# Altium PCB Micro+Complete+Ver1.0.pcbdoc
Units mil, origin at the board's own origin, x right, y up, seen from the top; angles counter-clockwise.
Board outline 3040 x 2112.05 mil, 2 copper layers (Top Layer, Bottom Layer); 36 components, 59 nets, 167 pads, 18 vias.
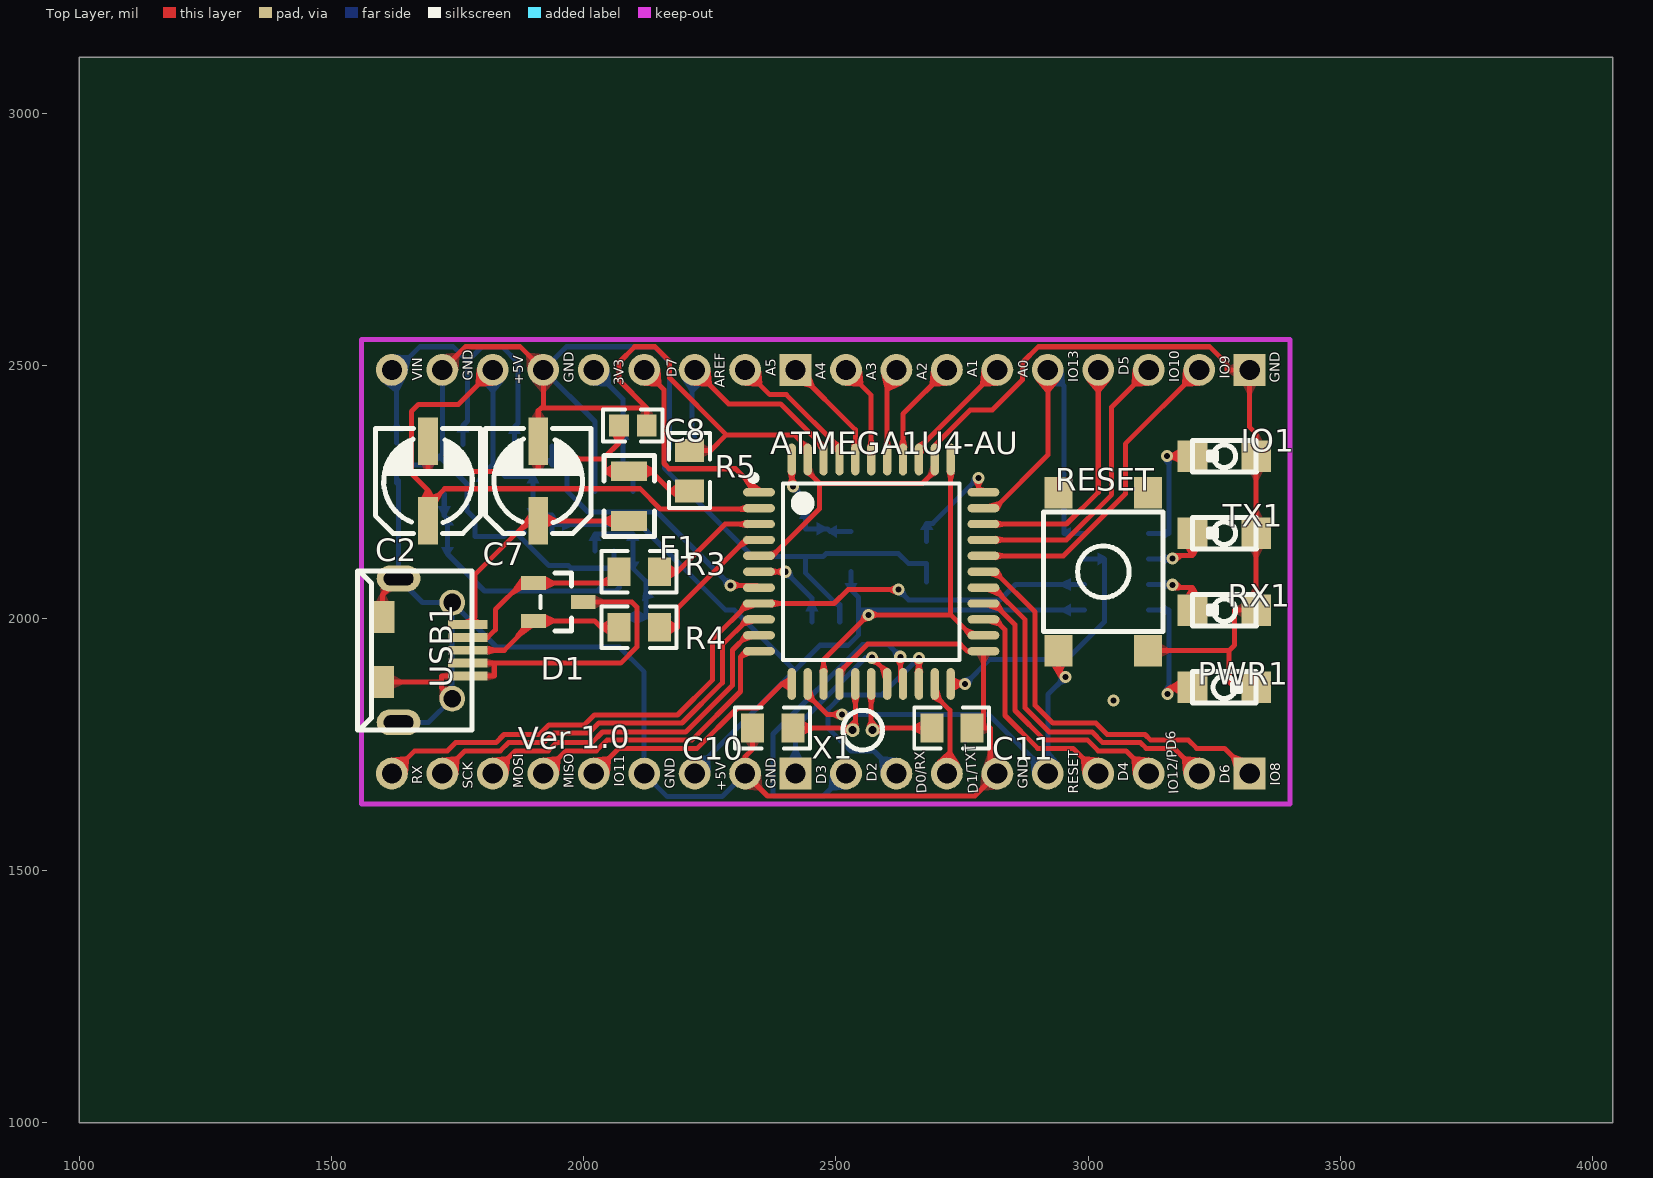
[diagram p0: Top Layer view]
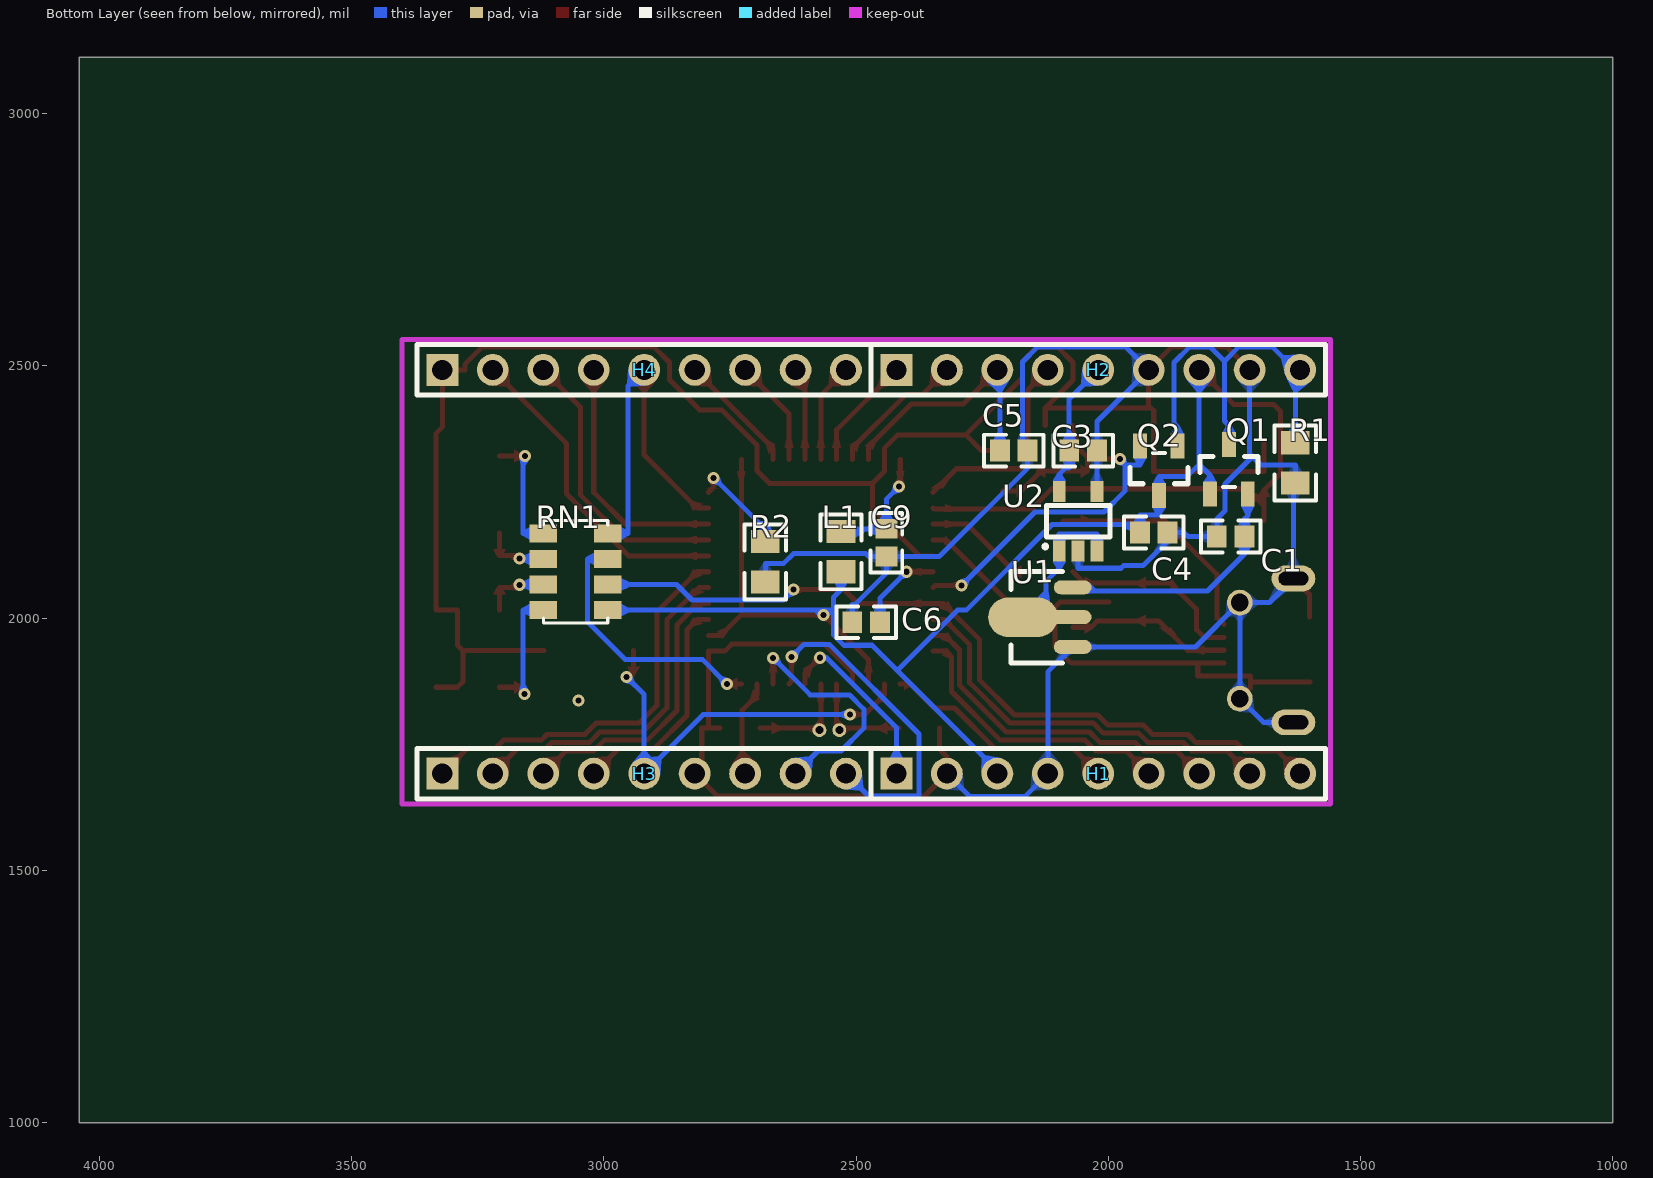
[diagram p1: Bottom Layer view, seen from below]

## Layer stack, top to bottom
Top Layer: signal copper (thickness not stored)
Dielectric: dielectric 12.6, FR-4, Dk 4.8
Bottom Layer: signal copper (thickness not stored)

## Board outline
4040,1000 1000,1000 1000,3112.05 4040,3112.05

## Components (designator, comment, footprint, x,y, rotation, side; value= is the part's Value field where it differs from the comment)
ATMEGA1U4-AU "ATMEGA32U4-AU" QFP-44_10X10X08P 2570,2092.05 r0 top
C1 "100nF" 0603#1 1757.55,2162.05 r0 bottom
C2 "22uF" CAP-SMD_BD5.0-L5.3-W5.3-FD 1691.49,2271.97 r90 top
C3 "1uF" 0603#1 2050,2332.05 r180 bottom
C4 "100nF" 0603#1 1910,2169.61 r180 bottom
C5 "100nF" 0603#1 2187.56,2332.05 r180 bottom
C6 "1uF" 0603#1 2480,1992.05 r0 bottom
C7 "22uF" CAP-SMD_BD5.0-L5.3-W5.3-FD 1910,2272.05 r90 top
C8 "100nF" 0603#2 2097.56,2382.05 r180 top
C9 "1uF" 0603#1 2440,2149.61 r270 bottom
C10 "22pF" 0805#1 2375,1782.05 r0 top
C11 "22pF" 0805#1 2730,1782.05 r0 top
D1 "AZ5125-02S.R7G" SOT-23-3_L2.9-W1.6-P1.90-LS2.8-BR#1 1950,2032.05 r180 top
F1 "SMD1206P050TF/15" FUSE-1206 2090,2242.05 r90 top
H1 "A2541WV-9P" SIP-2.54MM-9P-CJT-H8.54 2020,1692.05 r180 bottom
H2 "A2541WV-9P" SIP-2.54MM-9P-CJT-H8.54 2020,2492.05 r180 bottom
H3 "A2541WV-9P" SIP-2.54MM-9P-CJT-H8.54 2920,1692.05 r180 bottom
H4 "A2541WV-9P" SIP-2.54MM-9P-CJT-H8.54 2920,2492.05 r180 bottom
IO1 "LTST-C21KGKT" LED-SMD-3.2X1.6X1.1 3270,2321.03 r180 top
L1 "30Ω" 0805#2 2530,2132.05 r270 bottom
PWR1 "LTST-C21TBKT" LED-SMD-3.2X1.6X1.1 3270,1863.07 r0 top
Q1 "FDN340P" SOT-23-3_L2.9-W1.6-P1.90-LS2.8-BR#2 1761.13,2295.18 r90 bottom
Q2 "FDN340P" SOT-23-3_L2.9-W1.6-P1.90-LS2.8-BR#2 1900,2292.05 r270 bottom
R1 "10K" 0805#2 1629.5,2307.69 r270 bottom
R2 "1K" 0805#2 2680,2112.05 r270 bottom
R3 "22" 0805#1 2110,2092.05 r0 top
R4 "22" 0805#1 2110,1982.05 r0 top
R5 "10K" 0805#1 2210,2292.05 r270 top
RESET "TSA063G50-250" SW-SMD-T6X6-9.5X5.8 3030,2092.05 r90 top
RN1 "1K" 1206_X4 3056.1,2092.05 r90 bottom
RX1 "LTST-C21KSKT" LED-SMD-3.2X1.6X1.1 3270,2015.78 r180 top
TX1 "LTST-C21KSKT" LED-SMD-3.2X1.6X1.1 3270,2168.4 r180 top
U1 "LM1117F-5.0" SOT-89(SOT-89-3) 2120,2002.05 r270 bottom
U2 "LP2985-33DBVR" SOT-23-5 2060,2192.05 r270 bottom
USB1 "micro USBFemale" MICRO-USB-1 1685.5,1936.05 r180 top
X1 "16MHz" TXAL-1.9*6 2553,1778.05 r0 top

## Footprints (in the part's own frame and the unit in brackets; to place one, negate y for a bottom-side part, rotate by r counter-clockwise, add the part's x,y. Pads: shape width x height; smd on the part's side, far side on the other; paste and mask are expansions set on the pad)
0603#1 [mm]
  rect 1x1.1 smd: 1(0.7,0) 2(-0.7,0)
  silkscreen extent -1.5,-0.8 1.5,0.8
0603#2 [mm]
  rect 1x1.1 smd: 1(-0.7,0) 2(0.7,0)
  silkscreen extent -1.5,-0.8 1.5,0.8
0805#1 [mm]
  rect 1.16x1.45 smd: 1(-1.016,0) 2(1.016,0)
  silkscreen extent -1.9,-1.03 1.87,1.04
0805#2 [mm]
  rect 1.16x1.45 smd: 1(1.016,0) 2(-1.016,0)
  silkscreen extent -1.87,-1.04 1.9,1.03
1206_X4 [mm]
  rect 0.9x1.375 smd: 1(1.933,1.623) 2(0.643,1.623) 3(-0.643,1.623) 4(-1.933,1.623) 5(-1.933,-1.623) 6(-0.643,-1.623) 7(0.643,-1.623) 8(1.933,-1.623)
  silkscreen extent -2.58,-1.62 2.58,1.62
CAP-SMD_BD5.0-L5.3-W5.3-FD [mm]
  rect 2.4x1 smd: 1(-2,0) 2(2,0)
  silkscreen extent -2.65,-2.65 2.65,2.65
FUSE-1206 [mm]
  rect 1x1.801 smd: 1(-1.25,0) 2(1.25,0)
  silkscreen extent -2.03,-1.27 2.03,1.27
LED-SMD-3.2X1.6X1.1 [mm]
  rect 1.5x1.6 smd: 1(-1.6,0) 2(1.6,0)
  silkscreen extent -1.6,-0.8 1.6,0.8
MICRO-USB-1 [mm]
  round 1.3 hole 0.9: 0(-1.371,2.431) 0(-1.371,-2.41)
  oval 2.2x1.3 hole 0.7 slot 1.5 at 0 deg: 0(1.329,3.619) 0(1.329,-3.62)
  rect 1.2x1.6 smd: 0(2.14,-1.683) 0(2.156,1.596)
  rect 2x0.45 smd: 1(-2.156,-1.31) 2(-2.156,-0.66) 3(-2.156,-0.01) 4(-2.156,0.64) 5(-2.156,1.29)
  silkscreen extent -2.36,-4 3.4,4
QFP-44_10X10X08P [mm]
  oval 1.6x0.42 smd: 1(-5.65,4) 2(-5.65,3.2) 3(-5.65,2.4) 4(-5.65,1.6) 5(-5.65,0.8) 6(-5.65,0) 7(-5.65,-0.8) 8(-5.65,-1.6) 9(-5.65,-2.4) 10(-5.65,-3.2) 11(-5.65,-4) 23(5.65,-4) 24(5.65,-3.2) 25(5.65,-2.4) 26(5.65,-1.6) 27(5.65,-0.8) 28(5.65,0) 29(5.65,0.8) 30(5.65,1.6) 31(5.65,2.4) 32(5.65,3.2) 33(5.65,4)
  oval 0.42x1.6 smd: 12(-4,-5.65) 13(-3.2,-5.65) 14(-2.4,-5.65) 15(-1.6,-5.65) 16(-0.8,-5.65) 17(0,-5.65) 18(0.8,-5.65) 19(1.6,-5.65) 20(2.4,-5.65) 21(3.2,-5.65) 22(4,-5.65) 34(4,5.65) 35(3.2,5.65) 36(2.4,5.65) 37(1.6,5.65) 38(0.8,5.65) 39(0,5.65) 40(-0.8,5.65) 41(-1.6,5.65) 42(-2.4,5.65) 43(-3.2,5.65) 44(-4,5.65)
  silkscreen extent -6.08,-4.45 4.45,4.87
SIP-2.54MM-9P-CJT-H8.54 [mm]
  rect 1.6x1.6 hole 1.02: 1(-10.16,0)
  round 1.6 hole 1.02: 2(-7.62,0) 3(-5.08,0) 4(-2.54,0) 5(0,0) 6(2.54,0) 7(5.08,0) 8(7.62,0) 9(10.16,0)
  silkscreen extent -11.43,-1.27 11.43,1.27
SOT-23-3_L2.9-W1.6-P1.90-LS2.8-BR#1 [mm]
  rect 1.25x0.7 smd: 1(1.25,-0.95) 2(1.25,0.95) 3(-1.25,0)
  silkscreen extent -0.65,-1.46 0.9,1.46
SOT-23-3_L2.9-W1.6-P1.90-LS2.8-BR#2 [mm]
  rect 1.25x0.7 smd: 1(-1.25,0.95) 2(-1.25,-0.95) 3(1.25,0)
  silkscreen extent -0.9,-1.46 0.65,1.46
SOT-23-5 [mm]
  rect 1.06x0.65 smd: 1(1.5,-0.95) 2(1.5,0) 3(1.5,0.95) 4(-1.5,0.95) 5(-1.5,-0.95)
  silkscreen extent -0.8,-1.71 1.33,1.6
SOT-89(SOT-89-3) [mm]
  oval 0.7x1.9 smd: 1(1.501,1.25) 3(-1.501,1.25)
  oval 2x3.5 smd: 2(0,-1.25)
  oval 0.7x2.1 smd: 2(0,1.151)
  silkscreen extent -2.3,-1.85 2.3,0.75
SW-SMD-T6X6-9.5X5.8 [mm]
  rect 1.6x1.4 smd: 1(-3.975,2.249) 2(3.975,2.249) 3(-3.975,-2.249) 4(3.975,-2.249)
  silkscreen extent -3,-3 3,3
TXAL-1.9*6 [mm]
  round 0.7 hole 0.4: 1(-0.5,0) 2(0.5,0)
  silkscreen extent -1,-1 1,1

## Via types
v1: diameter 24, hole 12, Top Layer to Bottom Layer, 18 vias

## Nets (pads, with @x,y where several pads share a name; then routed paths per layer and width w, separated by ;. In a path a pad name is that pad's centre, name@x,y a point inside that pad or via, vN(x,y) a via of type N, cw(c..) or ccw(c..) an arc to the next point about the centre after c; other vN are vias at no path point)
3V3: C3.2 H2.5 U2.5 | length 277.5
  Bottom Layer w10: H2.5 2077.6,2434.45 C3.2 2077.6,2297.35 2085.2,2297.35 2097.4,2285.05 U2.5@2097.4,2251.05
+5V: ATMEGA1U4-AU.2 ATMEGA1U4-AU.14 ATMEGA1U4-AU.24 ATMEGA1U4-AU.34 C2.1 C4.2 H1.3 H2.7 L1.1 Q1.1 Q2.3 RN1.5 | length 3963.4
  Top Layer w10: C2.1 C2.1@1691.5,2223.35 ; H2.7 1751.8,2423.85 1672.7,2423.85 1658.7,2409.85 1658.7,2286.35 1691.5,2253.55 C2.1@1691.5,2223.35 ; ATMEGA1U4-AU.2 2345.6,2216.15 2152.4,2216.15 2112,2256.55 1724.6,2256.55 C2.1@1691.5,2223.35 ; ATMEGA1U4-AU.14 2475.5,1917.75 v1(2564.4,2006.65) 2727.5,2006.65 ; ATMEGA1U4-AU.34@2727.5,2314.45 2727.5,2006.65 ; ATMEGA1U4-AU.24@2792.4,1966.05 2768.1,1966.05 2727.5,2006.65
  Bottom Layer w10: Q1.1 1798.5,2283.65 1820,2305.15 ; H2.7 1820,2305.15 ; C4.2 C4.2@1937.6,2185.65 ; H1.3 2220,1697.95 2418.5,1896.35 ; L1.1 2530,2056.15 2545,2041.15 2545,2015.95 ; v1(2564.4,2006.65) v1@2564.4,2015.95 ; RN1.5 2952,2015.95 v1@2564.4,2015.95 ; 1820,2305.15 1844.6,2280.55 1900,2280.55 Q2.3 1900,2205.15 1900.8,2204.35 1937.6,2204.35 C4.2@1937.6,2185.65 ; C4.2@1937.6,2185.65 2111.6,2185.65 2281.4,2015.95 2298.9,2015.95 2418.5,1896.35 ; 2418.5,1896.35 2468.4,1946.35 2524.3,1946.35 2545,1967.15 2545,2015.95 ; 2545,2015.95 v1@2564.4,2015.95
A0: ATMEGA1U4-AU.36 H4.6 | length 242
  Top Layer w10: ATMEGA1U4-AU.36@2664.5,2314.45 2664.5,2336.55 H4.6
A1: ATMEGA1U4-AU.37 H4.7 | length 213.6
  Top Layer w10: ATMEGA1U4-AU.37@2633,2314.45 2633,2405.05 H4.7
A2: ATMEGA1U4-AU.38 H4.8 | length 185.3
  Top Layer w10: ATMEGA1U4-AU.38@2601.5,2314.45 2601.5,2473.55 H4.8
A3: ATMEGA1U4-AU.39 H4.9 | length 198.3
  Top Layer w10: H4.9 2570,2442.05 ATMEGA1U4-AU.39@2570,2314.45
A4: ATMEGA1U4-AU.40 H2.1 | length 226.7
  Top Layer w10: H2.1 2538.5,2373.55 ATMEGA1U4-AU.40@2538.5,2314.45
A5: ATMEGA1U4-AU.41 H2.2 | length 274.2
  Top Layer w10: H2.2 2369.1,2442.95 2401.8,2442.95 2507,2337.75 ATMEGA1U4-AU.41@2507,2314.45
AREF: ATMEGA1U4-AU.42 C5.2 H2.3 | length 505.9
  Top Layer w10: H2.3 2287.2,2424.85 2390.3,2424.85 2475.5,2339.65 ATMEGA1U4-AU.42@2475.5,2314.45
  Bottom Layer w10: C5.2 2215.1,2487.15 H2.3
AVCC: ATMEGA1U4-AU.44 C9.2 L1.2 | length 240.8
  Top Layer w10: ATMEGA1U4-AU.44@2412.5,2314.45 2412.5,2263.25 v1(2414.7,2261.15)
  Bottom Layer w10: v1(2414.7,2261.15) 2440,2235.75 C9.2 2483.3,2177.15 2488.4,2172.05 L1.2
D0/RX: ATMEGA1U4-AU.20 H3.8 | length 483.9
  Top Layer w10: ATMEGA1U4-AU.20 v1(2664.5,1921.35)
  Bottom Layer w10: H3.8 2575.4,1736.65 2530,1736.65 2484.6,1782.05 2484.6,1819.45 2513.1,1847.95 2591.1,1847.95 v1(2664.5,1921.35)
D1/TXT: ATMEGA1U4-AU.21 H3.7 | length 192.4
  Top Layer w10: ATMEGA1U4-AU.21 2696,1847.65 2725.9,1817.75 2725.9,1697.95 H3.7
D2/SDA: ATMEGA1U4-AU.19 H3.9 | length 676.3
  Top Layer w10: v1(2627.6,1923.45) 2627.6,1875.05 ATMEGA1U4-AU.19
  Bottom Layer w10: H3.9 2475.4,1647.45 2378.3,1647.45 2375.4,1650.35 2375.4,1770.35 2553.1,1948.05 2603.1,1948.05 v1(2627.6,1923.45)
D3/SCL: ATMEGA1U4-AU.18 H1.1 | length 364.1
  Top Layer w10: v1(2571.6,1921.55) 2601.5,1891.75 ATMEGA1U4-AU.18
  Bottom Layer w10: H1.1 2420,1782.85 2558.8,1921.55 v1(2571.6,1921.55)
D4*: ATMEGA1U4-AU.25 H3.4 | length 453.7
  Top Layer w10: ATMEGA1U4-AU.25 2814.5,1997.55 2835,1977.05 2835,1807.05 2900,1742.05 2970,1742.05 H3.4
D5*: ATMEGA1U4-AU.31 H4.4 | length 496.3
  Top Layer w10: ATMEGA1U4-AU.31@2792.4,2186.55 2957.1,2186.55 3020,2249.45 H4.4
D6*: ATMEGA1U4-AU.27 H3.2 | length 682.8
  Top Layer w10: ATMEGA1U4-AU.27 2811.5,2060.55 2875,1997.05 2875,1822.05 2922.8,1774.25 3007.8,1774.25 3028.9,1753.15 3103.9,1753.15 3115,1742.05 3170,1742.05 H3.2
D7: ATMEGA1U4-AU.1 H2.4 | length 413.7
  Top Layer w10: H2.4 2159.3,2452.75 2159.3,2306.55 2169.7,2296.15 2301,2296.15 ATMEGA1U4-AU.1@2347.6,2249.55
D+: ATMEGA1U4-AU.4 R4.2 | length 291.3
  Top Layer w10: R4.2 2185.9,1982.05 2185.9,2019.65 2321.3,2155.05 ATMEGA1U4-AU.4
D-: ATMEGA1U4-AU.3 R3.2 | length 236.7
  Top Layer w10: R3.2 2185.9,2092.05 2280.4,2186.55 ATMEGA1U4-AU.3@2347.6,2186.55
GND: ATMEGA1U4-AU.5 ATMEGA1U4-AU.15 ATMEGA1U4-AU.23 ATMEGA1U4-AU.35 ATMEGA1U4-AU.43 C1.1 C2.2 C3.1 C4.1 C5.1 C6.1 C7.2 C8.1 C9.1 C10.1 C11.2 D1.3 H1.2 H1.4 H2.6 H2.8 H3.6 H4.1 IO1.1 PWR1.2 R1.1 R2.1 R5.1 RESET.3 RX1.1 TX1.1 U1.1 U2.2 U2.4 USB1.0 USB1.4 USB1.5 | length 10006.8
  Top Layer w10: USB1.0@1600.6,1873.25 1717.9,1873.25 ; USB1.0@1601.3,2002.35 1601.3,2046.85 1601.5,2046.85 USB1.0@1633.2,2078.55 ; C2.2@1691.5,2350.65 1691.5,2290.35 1909.9,2290.35 1910,2290.45 C7.2 1910,2411.15 1915.7,2416.75 1920,2416.75 ; H2.8 1765.9,2537.95 1874.1,2537.95 H2.6 1920,2416.75 ; USB1.0@1739.5,1840.35 1717.9,1861.95 1717.9,1873.25 ; USB1.4@1770.4,1910.85 1822.8,1910.85 ; D1.3 2095.6,2032.05 2105.9,2021.75 2105.9,1943.35 2073.5,1910.85 1822.8,1910.85 ; C8.1 2125.1,2416.75 ; R5.1 2230.8,2332.05 2251.6,2332.05 2282.9,2363.35 ; C10.1 2335,1740.45 2320,1725.45 H1.2 2364.6,1647.45 2775.4,1647.45 H3.6 2805.9,1706.15 2805.9,1782.05 C11.2@2791.1,1782.05 ; ATMEGA1U4-AU.5 2374.4,2123.55 2467.6,2216.75 2467.6,2267.25 ; ATMEGA1U4-AU.15 2507,1892.95 2562.6,1948.55 2746.4,1948.55 2760.4,1934.55 ATMEGA1U4-AU.23 2792.4,1783.45 C11.2@2791.1,1782.05 ; C11.2 C11.2@2791.1,1782.05 ; RESET.3 3279.2,1935.55 ; PWR1.2@3333,1863.05 3290.4,1863.05 3279.2,1874.25 3279.2,1935.55 ; 1717.9,1873.25 1717.9,1885.25 1770.4,1885.25 1822.8,1885.25 1822.8,1910.85 ; 1920,2416.75 2125.1,2416.75 ; 2125.1,2416.75 2070,2471.95 2070,2506.75 2101.2,2537.95 2141.5,2537.95 2170,2509.45 2170,2476.25 2282.9,2363.35 ; 2282.9,2363.35 2417.5,2363.35 2444,2336.85 2444,2314.45 2444,2290.85 2467.6,2267.25 ; 2467.6,2267.25 2671.5,2267.25 2696,2291.75 2696,2314.45 2696,2342.35 2766.1,2412.45 2809.9,2412.45 2870,2472.55 2870,2506.75 2901.2,2537.95 3240.7,2537.95 3275.4,2503.15 3275.4,2492.05 H4.1 3320,2378.65 3333,2365.65 IO1.1 TX1.1 RX1.1 3290.4,2015.75 3290.4,1946.75 3279.2,1935.55
  Bottom Layer w10: R1.1@1629.5,2267.65 R1.1@1629.5,2276.05 ; USB1.0@1633.2,1793.55 1692.7,1793.55 1739.5,1840.35 USB1.0@1739.5,2030.95 ; H2.8 1720,2326.05 1714.4,2320.45 ; C4.1 C4.1@1866.1,2169.55 ; U2.4@2022.6,2251.05 2022.6,2297.15 2022.4,2297.35 C3.1 2022.4,2389.65 H2.6 1965.9,2537.95 2139.8,2537.95 2170,2507.75 2170,2336.35 C5.1@2160,2326.35 ; U2.2 2060,2098.95 1975.4,2098.95 1970.2,2104.15 1931.5,2104.15 C4.1@1866.1,2169.55 ; C5.1 C5.1@2160,2326.35 ; H1.2 2274.1,1646.15 2165.9,1646.15 H1.4 2120,1893.75 U1.1 1827.5,1942.95 USB1.0@1739.5,2030.95 ; C6.1 2507.6,2026.75 2502.5,2026.75 2440,2089.25 2440,2120.45 C9.1 ; R2.1 2680,2107.95 2644.1,2107.95 2624.1,2127.95 2480.7,2127.95 2474.7,2122.05 C9.1 ; R1.1@1629.5,2276.05 1633.2,2272.35 1633.2,2078.55 1680.8,2030.95 USB1.0@1739.5,2030.95 ; R1.1@1629.5,2276.05 1629.5,2303.65 1697.6,2303.65 1714.4,2320.45 ; 1714.4,2320.45 1769,2265.85 1769,2212.95 1785.1,2196.75 C1.1 1842.1,2162.05 1849.7,2169.55 C4.1@1866.1,2169.55 ; C5.1@2160,2326.35 2160,2314.65 2160,2297.35 2335.3,2122.05 C9.1
  other v1: 3050,1837.05
HWB: ATMEGA1U4-AU.33 R2.2 | length 208.3
  Top Layer w10: v1(2782.3,2278.15) 2782.3,2259.75 ATMEGA1U4-AU.33@2792.4,2249.55
  Bottom Layer w10: R2.2 2680,2187.95 2692.1,2187.95 v1(2782.3,2278.15)
IO8: ATMEGA1U4-AU.28 H3.1 | length 801.7
  Top Layer w10: ATMEGA1U4-AU.28 2815,2092.05 2895,2012.05 2895,1827.05 2930,1792.05 3015,1792.05 3037.8,1769.25 3112.8,1769.25 3123.9,1758.15 3198.9,1758.15 3215,1742.05 3270,1742.05 H3.1
IO9*: ATMEGA1U4-AU.29 H4.2 | length 638.5
  Top Layer w10: ATMEGA1U4-AU.29 2950.9,2123.55 3073.7,2246.25 3073.7,2345.65 H4.2
IO10*: ATMEGA1U4-AU.30 H4.3 | length 569
  Top Layer w10: ATMEGA1U4-AU.30 2956.8,2155.05 3046.5,2244.75 3046.5,2418.55 H4.3
IO11*: ATMEGA1U4-AU.12 H1.5 | length 466.1
  Top Layer w10: H1.5 2070,1742.05 2225,1742.05 2305,1822.05 2345,1822.05 2392.6,1869.65 ATMEGA1U4-AU.12
IO12*/PD6: ATMEGA1U4-AU.26 H3.3 | length 566.8
  Top Layer w10: ATMEGA1U4-AU.26@2792.4,2029.05 2813,2029.05 2855,1987.05 2855,1817.05 2913.9,1758.15 2998.9,1758.15 3020,1737.05 3075,1737.05 H3.3
IO13: ATMEGA1U4-AU.32 H4.5 RN1.8 | length 717.3
  Top Layer w10: ATMEGA1U4-AU.32 2814.7,2218.05 2920,2323.25 H4.5
  Bottom Layer w10: H4.5 2952,2460.05 2952,2168.15 RN1.8
MISO: ATMEGA1U4-AU.11 H1.6 | length 568.1
  Top Layer w10: H1.6 1965,1737.05 2025,1737.05 2046.1,1758.15 2214.4,1758.15 2311.1,1854.75 2311.1,1923.15 2322.5,1934.55 ATMEGA1U4-AU.11
MOSI: ATMEGA1U4-AU.10 H1.7 | length 682.1
  Top Layer w10: H1.7 1865,1737.05 1930,1737.05 1946.1,1753.15 2016.1,1753.15 2037.2,1774.25 2202.2,1774.25 2295,1867.05 2295,1937.05 2324,1966.05 ATMEGA1U4-AU.10@2347.6,1966.05
null: 
Q1_2: C1.2 Q1.2 U1.3 | length 495.3
  Bottom Layer w10: Q1.2 1723.7,2203.05 1730,2196.75 1730,2174.85 C1.2 1730,2127.35 1803.3,2054.05 2063.7,2054.05 U1.3
R3_1: D1.1 R3.1 USB1.2 | length 376.9
  Top Layer w10: USB1.2 1810,1962.05 1825,1977.05 1825,2017.05 1877.4,2069.45 D1.1 2047.4,2069.45 R3.1
R4_1: D1.2 R4.1 USB1.3 | length 328.9
  Top Layer w10: USB1.3 1842.61,1936.46 1900.8,1994.65 2021.5,1994.65 2034.1,1982.05 R4.1
RESET: ATMEGA1U4-AU.13 H3.5 RESET.1 | length 829.4
  Top Layer w10: ATMEGA1U4-AU.13 2444,1847.65 2482.6,1809.05 v1(2511.9,1809.05) ; RESET.1@2941.5,1935.55 2941.5,1890.95 2947.4,1890.95 v1(2954.9,1883.45)
  Bottom Layer w10: v1(2511.9,1809.05) 2803,1809.05 H3.5 2920,1848.55 v1(2954.9,1883.45)
RN1_1: IO1.2 RN1.1 | length 246
  Top Layer w10: v1(3155.9,2321.05) IO1.2
  Bottom Layer w10: RN1.1 3160.2,2168.15 3160.2,2316.75 v1(3155.9,2321.05)
RN1_2: RN1.2 TX1.2 | length 134.2
  Top Layer w10: v1(3167.3,2118.05) 3173.1,2123.85 3207,2123.85 TX1.2
  Bottom Layer w10: RN1.2 3160.2,2117.35 3166.6,2117.35 v1(3167.3,2118.05)
RN1_3: RN1.3 RX1.2 | length 134.3
  Top Layer w10: v1(3167.3,2066.15) 3173,2060.35 3207,2060.35 RX1.2
  Bottom Layer w10: RN1.3 3160.2,2066.75 3166.6,2066.75 v1(3167.3,2066.15)
RN1_4: PWR1.1 RN1.4 | length 266.3
  Top Layer w10: v1(3157,1849.95) 3164.4,1857.35 3164.4,1863.05 PWR1.1@3207,1863.05
  Bottom Layer w10: RN1.4 3160.2,2015.95 3160.2,1853.15 v1(3157,1849.95)
RX1: ATMEGA1U4-AU.8 H1.9 RN1.6 | length 1591.2
  Top Layer w10: H1.9 1665,1737.05 1730,1737.05 1746.1,1753.15 1826.1,1753.15 1842.2,1769.25 1912.2,1769.25 1931.1,1788.15 2001.1,1788.15 2021.1,1808.15 2186.1,1808.15 2255,1877.05 2255,1957.05 2327,2029.05 2347.6,2029.05 2496.4,2029.05 2523.8,2056.55 v1(2623.9,2056.55)
  Bottom Layer w10: v1(2623.9,2056.55) 2644.3,2036.15 2825.2,2036.15 2855.9,2066.75 RN1.6
S$21: 
S$23: 
S$29: 
S$31: 
S$67: 
S$69: 
S$80: 
S$82: 
S$84: 
S$86: 
SCK: ATMEGA1U4-AU.9 H1.8 | length 798.1
  Top Layer w10: H1.8 1765,1737.05 1835,1737.05 1851.1,1753.15 1921.1,1753.15 1940,1772.05 2010,1772.05 2030,1792.05 2195,1792.05 2275,1872.05 2275,1947.05 2325.5,1997.55 ATMEGA1U4-AU.9
TX1: ATMEGA1U4-AU.22 RN1.7 | length 520.6
  Top Layer w10: ATMEGA1U4-AU.22 v1(2756.1,1869.65)
  Bottom Layer w10: v1(2756.1,1869.65) 2804.9,1918.45 2958,1918.45 3032.4,1992.85 3032.4,2117.35 RN1.7
U2_1: U1.2 U2.1 U2.3 | length 379
  Bottom Layer w10: U2.3 2022.6,2166.95 2097.4,2166.95 U2.1 2097.4,2128.25 2097.4,2098.95 2123.3,2073.15 U1.2@2123.3,2002.05 ; U1.2@2074.7,2002.05 U1.2@2123.3,2002.05 ; U1.2@2169.2,2002.05 U1.2@2123.3,2002.05
UCAP: ATMEGA1U4-AU.6 C6.2 | length 174.3
  Top Layer w10: ATMEGA1U4-AU.6 v1(2400.2,2092.05)
  Bottom Layer w10: v1(2400.2,2092.05) 2452.5,2039.75 C6.2@2452.5,1992.05
USB1_1: C7.1 F1.1 USB1.1 | length 454.7
  Top Layer w10: USB1.1 1785,2002.25 1785,2087.05 1891.3,2193.35 1910,2193.35 1910.51,2192.84 F1.1
VIN: H2.9 Q1.3 Q2.1 R1.2 | length 787.3
  Bottom Layer w10: H2.9 H2.9@1629.5,2492.05 ; R1.2@1629.5,2347.65 1629.5,2383.65 H2.9@1629.5,2492.05 ; Q1.3 1761.1,2382.05 1770,2390.95 1770,2509.45 ; Q2.1 1862.6,2378.95 1870,2386.35 1870,2506.75 1838.8,2537.95 1798.5,2537.95 1770,2509.45 ; H2.9@1629.5,2492.05 1675.4,2537.95 1741.5,2537.95 1770,2509.45
VUSB: ATMEGA1U4-AU.7 C8.2 F1.2 Q2.2 R5.2 | length 949.4
  Top Layer w10: v1(1977,2315.25) 2041.5,2315.25 ; C8.2 2070,2347.35 2041.5,2318.75 2041.5,2315.25 ; R5.2 2172.6,2252.05 2138.5,2286.15 2138.5,2291.25 2090,2291.25 2041.5,2291.25 2041.5,2315.25 ; v1(2290.9,2064.85) 2343.2,2064.85 ATMEGA1U4-AU.7
  Bottom Layer w10: Q2.2 1937.4,2303.55 1966.6,2303.55 ; v1(1977,2315.25) 1966.6,2304.95 1966.6,2303.55 ; v1(2290.9,2064.85) 2145.4,2210.45 2008.6,2210.45 1966.6,2252.35 1966.6,2303.55
XTAL1: ATMEGA1U4-AU.17 C11.1 X1.2 | length 211.7
  Top Layer w10: ATMEGA1U4-AU.17 2570,1780.75 X1.2 2576.7,1782.05 C11.1
XTAL2: ATMEGA1U4-AU.16 C10.2 X1.1 | length 213.7
  Top Layer w10: C10.2 2529.3,1782.05 X1.1 2538.5,1783.25 ATMEGA1U4-AU.16
pads on no net: RESET.2 RESET.4

## Polygon pours and split planes (outlines as drawn)
GND on Bottom Layer (solid): 1500,2612.05 3540,2612.05 3540,1572.05 1500,1572.05 1500,2612.05
GND on Top Layer (solid): 1520,2592.05 3520,2592.05 3520,1592.05 1520,1592.05 1520,2592.05

## Other copper
Top Layer:
  region net D6*: 3188.57,1690.08 3221.97,1723.48 3193.21,1725.91 3186.14,1718.84
  region net IO12*/PD6: 3088.57,1690.08 3121.97,1723.48 3093.21,1725.91 3086.14,1718.84
  region net D4*: 2988.57,1690.08 3021.97,1723.48 2993.21,1725.91 2986.14,1718.84
  region net D1/TXT: 2699.47,1715.93 2746.26,1709.44 2730.9,1733.83 2720.9,1735.22
  region net A5: 2318.03,2460.62 2351.43,2494.02 2353.86,2465.26 2346.79,2458.19
  region net AREF: 2218.03,2460.62 2251.43,2494.02 2253.86,2465.26 2246.79,2458.19
  region net D7: 2118.03,2460.62 2151.43,2494.02 2153.86,2465.26 2146.79,2458.19
  region net +5V: 1788.57,2494.02 1821.97,2460.62 1793.21,2458.19 1786.14,2465.26
  region net IO11*: 2018.03,1723.48 2051.43,1690.08 2053.86,1718.84 2046.79,1725.91
  region net MISO: 1918.03,1723.48 1951.43,1690.08 1953.86,1718.84 1946.79,1725.91
  region net MOSI: 1818.03,1723.48 1851.43,1690.08 1853.86,1718.84 1846.79,1725.91
  region net SCK: 1718.03,1723.48 1751.43,1690.08 1753.86,1718.84 1746.79,1725.91
  region net RX1: 1618.03,1723.48 1651.43,1690.08 1653.86,1718.84 1646.79,1725.91
  region net IO9*: 3188.57,2494.01 3221.98,2460.62 3193.23,2458.18 3186.15,2465.25
  region net IO10*: 3088.57,2494.02 3121.97,2460.62 3093.21,2458.19 3086.14,2465.26
  region net D5*: 3043.62,2471.22 2996.38,2471.22 3015,2449.17 3025,2449.17
  region net IO13: 2943.62,2471.22 2896.38,2471.22 2915,2449.17 2925,2449.17
  region net A0: 2788.57,2494.02 2821.97,2460.62 2793.22,2458.19 2786.14,2465.26
  region net A1: 2688.57,2494.02 2721.97,2460.62 2693.21,2458.19 2686.14,2465.27
  region net A2: 2632.32,2463.06 2589.7,2483.45 2596.5,2455.76 2606.5,2450.98
  region net A3: 2518.03,2460.62 2551.43,2494.02 2553.86,2465.26 2546.79,2458.19
  region net XTAL2: 2525.9,1789.67 2545.76,1783.94 2543.5,1794.63 2533.5,1797.52
  region net XTAL2: 2526.6,1790.09 2522.19,1769.9 2513.88,1777.05 2516.06,1787.05
  region net XTAL1: 2581.62,1788.56 2561.16,1785.58 2565,1795.89 2575,1797.34
  region net XTAL1: 2583.81,1769.9 2579.4,1790.09 2589.94,1787.05 2592.12,1777.05
  region net +5V: 2565.15,1994.67 2552.42,2007.4 2549.31,1998.63 2556.38,1991.56
  region net +5V: 2572.34,1997.65 2572.34,2015.65 2580.74,2011.65 2580.74,2001.65
  region net VUSB: 2298.84,2055.85 2298.84,2073.85 2307.24,2069.85 2307.24,2059.85
  region net VUSB: 1984.94,2306.25 1984.94,2324.25 1993.34,2320.25 1993.34,2310.25
  region net UCAP: 2392.26,2083.05 2392.26,2101.05 2383.86,2097.05 2383.86,2087.05
  region net RN1_1: 3163.84,2312.05 3163.84,2330.05 3172.24,2326.05 3172.24,2316.05
  region net RN1_2: 3177.91,2112.45 3171.53,2129.28 3180.68,2128.85 3184.47,2118.85
  region net RN1_3: 3177.91,2071.75 3171.53,2054.92 3180.68,2055.35 3184.47,2065.35
  region net TX1: 2748.16,1860.65 2748.16,1878.65 2739.76,1874.65 2739.76,1864.65
  region net AVCC: 2422.55,2270.23 2404.71,2267.8 2407.5,2276.66 2417.5,2278.02
  region net RN1_4: 3153.07,1861.29 3168.74,1852.44 3169.4,1860.23 3159.4,1865.87
  region net RX1: 2615.96,2047.55 2615.96,2065.55 2607.56,2061.55 2607.56,2051.55
  region net RESET: 2952.37,1895.18 2943.58,1879.47 2938.7,1885.95 2944.3,1895.95
  region net RESET: 2503.96,1800.05 2503.96,1818.05 2495.56,1814.05 2495.56,1804.05
  region net HWB: 2773.3,2270.21 2791.3,2270.21 2787.3,2261.81 2777.3,2261.81
  region net D3/SCL: 2583.58,1922.32 2570.87,1909.57 2579.64,1906.47 2586.7,1913.56
  region net D0/RX: 2655.5,1913.41 2673.5,1913.41 2669.5,1905.01 2659.5,1905.01
  region net D2/SDA: 2618.6,1915.51 2636.6,1915.51 2632.6,1907.11 2622.6,1907.11
  region net IO8: 3288.5,1705.87 3306.18,1723.55 3290.27,1728.85 3283.2,1721.78
  region net A4: 2451.5,2478.23 2433.83,2460.55 2449.73,2455.25 2456.8,2462.32
  region net RN1_4: 3177.52,1850.55 3177.52,1875.55 3164.4,1868.05 3164.4,1858.05
  region net R4_1: 1809.8,1945.35 1809.8,1927.55 1824.8,1931.46 1824.8,1941.46
  region net R3_1: 1809.8,1970.95 1809.8,1953.15 1810,1957.05 1810,1967.05
  region net USB1_1: 1766.8,1996.55 1791.8,1996.55 1788.54,1998.71 1777.93,2002.25
  region net RN1_1: 3177.52,2308.55 3177.52,2333.55 3162.52,2326.05 3162.52,2316.05
  region net RN1_2: 3219.5,2136.92 3194.5,2136.92 3202,2123.85 3212,2123.85
  region net XTAL2: 2437.8,1794.55 2437.8,1769.55 2452.8,1777.05 2452.8,1787.05
  region net XTAL1: 2667.2,1769.55 2667.2,1794.55 2652.2,1787.05 2652.2,1777.05
  region net R4_1: 2047.2,1969.55 2047.2,1994.55 2034.1,1987.05 2034.1,1977.05
  region net D+: 2172.8,1994.55 2172.8,1969.55 2185.9,1977.05 2185.9,1987.05
  region net RN1_3: 3194.5,2047.27 3219.5,2047.27 3212,2060.35 3202,2060.35
  region net +5V: 1688.45,2240.45 1711.2,2230.09 1718.43,2243.28 1708.72,2247.7
  region net +5V: 1679,2240.45 1704,2240.45 1696.5,2253.55 1686.5,2253.55
  region net VUSB: 2181.5,2239.55 2181.5,2264.55 2172.6,2257.05 2172.6,2247.05
  region net R4_1: 1925.4,2007.15 1925.4,1982.15 1940.4,1989.65 1940.4,1999.65
  region net R4_1: 1899.5,1980.85 1876.2,1980.85 1864.93,1965.85 1879.07,1965.85
  region net R3_1: 1925.4,2081.95 1925.4,2056.95 1940.4,2064.45 1940.4,2074.45
  region net R3_1: 1876.2,2055.75 1876.2,2080.75 1861.2,2060.32 1861.2,2046.18
  region net VUSB: 2082.5,2360.4 2057.5,2360.4 2065,2347.35 2075,2347.35
  region net USB1_1: 1890.3,2179.85 1890.3,2204.85 1875.3,2184.42 1875.3,2170.28
  region net USB1_1: 1929.7,2205.79 1929.7,2180.79 1944.7,2188.25 1944.7,2198.25
  region net R3_1: 2047.2,2063.55 2047.2,2081.95 2032.2,2074.45 2032.2,2064.45
  region net D-: 2172.83,2104.55 2172.83,2079.55 2185.9,2087.05 2185.9,2097.05
  region net USB1_1: 2054.6,2180.44 2054.6,2205.44 2039.6,2197.98 2039.6,2187.98
  region net VUSB: 2054.6,2278.75 2054.6,2303.75 2041.5,2296.25 2041.5,2286.25
  region net VUSB: 2125.5,2303.75 2125.5,2278.75 2138.5,2286.25 2138.5,2296.25
  region net RESET: 2954,1904.05 2929,1904.05 2936.5,1890.95 2946.5,1890.95
  region net D7: 2326.85,2257.8 2351.85,2257.8 2331.42,2272.8 2317.28,2272.8
  region net +5V: 2325.37,2209.83 2323.29,2226.23 2308.82,2221.15 2310.08,2211.15
  region net D-: 2324.34,2194.81 2324.33,2178.27 2309.33,2181.55 2309.33,2191.55
  region net D+: 2325.32,2146.77 2323.35,2163.25 2307.35,2148.17 2312.42,2139.1
  region net UCAP: 2370.79,2083.78 2370.79,2100.32 2385.79,2097.05 2385.79,2087.05
  region net RX1: 2370.79,2037.33 2370.78,2020.79 2385.79,2024.05 2385.79,2034.05
  region net RX1: 2338.86,2020.79 2317.15,2033.15 2308.77,2017.89 2318.52,2013.5
  region net SCK: 2336.41,1989.29 2317.51,2002.23 2310.35,1989.47 2318.6,1983.58
  region net MOSI: 2332.95,1957.8 2318.36,1971.79 2310.08,1959.2 2317.23,1952.21
  region net MISO: 2328.8,1926.3 2320.4,1941.84 2308.7,1927.82 2314.85,1919.83
  region net IO11*: 2404.25,1857.15 2404.25,1882.15 2392.6,1874.65 2392.6,1864.65
  region net RESET: 2452.29,1858.59 2439.39,1839.53 2452.23,1832.35 2458.05,1840.67
  region net +5V: 2483.78,1892.84 2467.24,1892.83 2470.5,1907.84 2480.5,1907.84
  region net XTAL2: 2546.77,1846.38 2530.23,1846.38 2533.5,1831.38 2543.5,1831.38
  region net XTAL1: 2578.27,1846.38 2561.73,1846.38 2565,1831.38 2575,1831.38
  region net D3/SCL: 2593.23,1880.91 2606.21,1899.63 2593.52,1906.76 2587.56,1898.58
  region net D0/RX: 2672.76,1892.83 2656.22,1892.84 2659.5,1907.84 2669.5,1907.84
  region net D1/TXT: 2704.25,1858.67 2691.37,1839.52 2704.26,1832.32 2710.04,1840.68
  region net TX1: 2735.75,1882.15 2735.75,1857.15 2750.75,1864.65 2750.75,1874.65
  region net +5V: 2764.16,1959.53 2775.6,1974.34 2760.88,1980.34 2754.23,1972.85
  region net D4*: 2822.49,2002.23 2803.6,1989.29 2821.4,1983.58 2829.65,1989.47
  region net IO12*/PD6: 2822.85,2033.15 2801.14,2020.79 2821.48,2013.5 2831.23,2017.89
  region net D6*: 2823.8,2059.04 2799.73,2052.28 2822.35,2042.63 2833.59,2045.53
  region net IO8: 2822.28,2097.02 2804.67,2083.78 2821.63,2078.35 2829.37,2084.75
  region net IO9*: 2815.67,2115.28 2815.67,2131.82 2830.67,2128.55 2830.67,2118.55
  region net IO10*: 2815.67,2146.77 2815.66,2163.31 2830.67,2160.05 2830.67,2150.05
  region net D5*: 2815.67,2178.27 2815.66,2194.81 2830.67,2191.55 2830.67,2181.55
  region net IO13: 2803.99,2226.3 2822.42,2213.25 2829.53,2225.8 2821.47,2231.89
  region net HWB: 2771.73,2257.8 2783.46,2257.8 2789.34,2259.75 2796.73,2257.8 2783.46,2257.8 2778.75,2256.23 2771.73,2257.8
  region net +5V: 2735.75,2291.27 2719.21,2291.25 2722.5,2276.25 2732.5,2276.27
  region net A0: 2659.82,2344.54 2672.76,2325.64 2678.47,2343.45 2672.58,2351.7
  region net A1: 2641.26,2337.71 2624.72,2337.72 2628,2352.72 2638,2352.72
  region net A2: 2609.77,2337.72 2593.23,2337.72 2596.5,2352.72 2606.5,2352.72
  region net A3: 2578.27,2337.72 2561.73,2337.72 2565,2352.72 2575,2352.72
  region net A4: 2546.77,2337.72 2530.23,2337.72 2533.5,2352.72 2543.5,2352.72
  region net A5: 2498.74,2328.36 2512.49,2343.91 2500.1,2351.73 2493.25,2344.43
  region net AREF: 2467.24,2333.56 2482.9,2341.43 2468.76,2353.46 2460.68,2347.4
  region net AVCC: 2420.79,2291.25 2404.25,2291.27 2407.5,2276.27 2417.5,2276.25
Bottom Layer:
  region net RESET: 2943.62,1712.88 2896.38,1712.88 2915,1734.93 2925,1734.93
  region net RESET: 2888.57,1690.08 2921.97,1723.48 2893.21,1725.91 2886.14,1718.83
  region net D0/RX: 2588.57,1690.08 2621.97,1723.48 2593.21,1725.91 2586.14,1718.84
  region net D2/SDA: 2488.57,1694.02 2521.97,1660.62 2493.21,1658.19 2486.14,1665.26
  region net AREF: 2241.09,2468.65 2194.15,2474.05 2210.1,2450.03 2220.1,2448.88
  region net 3V3: 2018.03,2460.62 2051.43,2494.02 2053.86,2465.26 2046.79,2458.19
  region net +5V: 1843.62,2471.22 1796.38,2471.22 1815,2449.17 1825,2449.17
  region net VIN: 1650.74,2485.18 1622.98,2523.41 1651.72,2521.34 1657.67,2513.15
  region net VIN: 1601.58,2466.5 1647.65,2476.97 1634.5,2451.37 1624.5,2449.1
  region net +5V: 2251.48,1693.14 2214.99,1723.14 2243.35,1728.36 2251.11,1721.98
  region net IO13: 2918.03,2460.62 2951.43,2494.02 2953.86,2465.27 2946.79,2458.19
  region net +5V: 2563,2018.57 2552.75,2003.77 2547.51,2010.95 2554.43,2020.95
  region net +5V: 2576.05,2003.77 2565.8,2018.57 2574.37,2020.95 2581.29,2010.95
  region net VUSB: 2291.66,2076.83 2278.92,2064.1 2275.82,2072.87 2282.89,2079.94
  region net VUSB: 1977.69,2303.27 1965.03,2316.06 1963.08,2308.5 1970.12,2301.4
  region net UCAP: 2412.18,2092.8 2399.45,2080.07 2408.22,2076.96 2415.29,2084.03
  region net RN1_1: 3149.31,2311.02 3166.67,2315.76 3165.2,2306.65 3155.2,2303.92
  region net RN1_2: 3159.76,2108.72 3158.98,2126.7 3150.76,2122.35 3151.19,2112.35
  region net RN1_3: 3159.7,2075.43 3159.04,2057.45 3150.79,2061.75 3151.16,2071.75
  region net TX1: 2768.07,1868.9 2755.35,1881.63 2764.12,1884.74 2771.19,1877.67
  region net AVCC: 2426.68,2261.88 2413.93,2249.17 2422.69,2246.05 2429.77,2253.1
  region net RN1_4: 3167.38,1855.97 3149.73,1859.5 3155.2,1866.97 3165.2,1864.97
  region net RX1: 2635.88,2057.3 2623.15,2044.57 2631.92,2041.46 2638.99,2048.53
  region net RESET: 2955.65,1871.47 2942.93,1884.2 2939.81,1875.43 2946.89,1868.36
  region net RESET: 2519.84,1800.05 2519.84,1818.05 2528.24,1814.05 2528.24,1804.05
  region net HWB: 2783.05,2266.17 2770.32,2278.9 2767.21,2270.13 2774.28,2263.06
  region net D3/SCL: 2563.66,1912.55 2563.66,1930.55 2558.8,1926.55 2558.8,1916.55
  region net D0/RX: 2665.25,1909.37 2652.53,1922.1 2649.41,1913.33 2656.48,1906.26
  region net D2/SDA: 2628.37,1935.42 2615.62,1922.72 2612.53,1931.5 2619.61,1938.55
  region net Q1_2: 1717.5,2140.35 1742.5,2140.35 1735,2127.35 1725,2127.35
  region net Q1_2: 1742.5,2183.75 1717.5,2183.75 1725,2196.75 1735,2196.75
  region net +5V: 1887.5,2218.21 1912.5,2218.21 1905,2205.15 1895,2205.15
  region net +5V: 1912.5,2267.41 1887.5,2267.41 1895,2280.55 1905,2280.55
  region net VUSB: 1924.9,2316.61 1949.9,2316.61 1942.4,2303.55 1932.4,2303.55
  region net VIN: 1875.1,2365.81 1850.1,2365.81 1857.6,2378.95 1867.6,2378.95
  region net VIN: 1642,2370.55 1617,2370.55 1624.5,2383.65 1634.5,2383.65
  region net U2_1: 2109.9,2153.85 2084.9,2153.85 2092.4,2166.95 2102.4,2166.95
  region net U2_1: 2084.9,2112.05 2109.9,2112.05 2102.4,2098.95 2092.4,2098.95
  region net U2_1: 2035.1,2153.85 2010.1,2153.85 2017.6,2166.95 2027.6,2166.95
  region net 3V3: 2109.9,2271.95 2084.9,2271.95 2092.4,2285.05 2102.4,2285.05
  region net 3V3: 2065.1,2310.39 2090.1,2310.39 2082.6,2297.35 2072.6,2297.35
  region net 3V3: 2090.1,2353.69 2065.1,2353.69 2072.6,2368.69 2082.6,2368.69
  region net +5V: 1957.28,2173.15 1957.28,2191.3 1972.28,2190.65 1972.28,2180.65
  region net +5V: 1950.1,2191.3 1925.1,2191.3 1932.6,2204.35 1942.6,2204.35
  region net UCAP: 2465,2013.75 2440,2013.75 2447.5,2028.75 2457.5,2028.75
  region net RN1_1: 3147.1,2155.65 3147.1,2180.65 3160.2,2173.15 3160.2,2163.15
  region net RN1_2: 3147.1,2104.85 3147.1,2129.85 3160.2,2122.35 3160.2,2112.35
  region net RN1_3: 3147.1,2054.25 3147.1,2079.25 3160.2,2071.75 3160.2,2061.75
  region net RN1_4: 3147.1,2003.45 3147.1,2028.45 3160.2,2020.95 3160.2,2010.95
  region net +5V: 2965.1,2028.45 2965.1,2003.45 2952,2010.95 2952,2020.95
  region net RX1: 2965.1,2079.25 2965.1,2054.25 2950.1,2061.75 2950.1,2071.75
  region net TX1: 3019.3,2104.85 3019.3,2129.85 3032.4,2122.35 3032.4,2112.35
  region net IO13: 2965.1,2180.65 2965.1,2155.65 2952,2163.15 2952,2173.15
  region net VIN: 1773.6,2368.95 1748.6,2368.95 1756.1,2382.05 1766.1,2382.05
  region net Q1_2: 1711.2,2221.35 1736.2,2221.35 1728.7,2206.35 1718.7,2206.35
  region net +5V: 1811,2270.55 1786,2270.55 1793.5,2283.65 1803.5,2283.65
  region net +5V: 2517.5,2069.25 2542.5,2069.25 2535,2056.15 2525,2056.15
  region net AVCC: 2501.5,2184.55 2501.5,2159.55 2488.4,2167.05 2488.4,2177.05
  region net AVCC: 2461.65,2164.65 2461.65,2189.65 2476.65,2182.15 2476.65,2172.15
  region net AVCC: 2452.5,2196.85 2427.5,2196.85 2435,2211.85 2445,2211.85
  region net HWB: 2692.5,2174.88 2667.5,2174.88 2675,2187.95 2685,2187.95
  region net AREF: 2227.6,2353.75 2202.6,2353.75 2210.1,2368.75 2220.1,2368.75
  region net Q1_2: 1717.5,2140.35 1742.5,2140.35 1735,2127.35 1725,2127.35
  region net Q1_2: 1742.5,2183.75 1717.5,2183.75 1725,2196.75 1735,2196.75
  region net +5V: 1887.5,2218.21 1912.5,2218.21 1905,2205.15 1895,2205.15
  region net +5V: 1912.5,2267.41 1887.5,2267.41 1895,2280.55 1905,2280.55
  region net VUSB: 1924.9,2316.61 1949.9,2316.61 1942.4,2303.55 1932.4,2303.55
  region net VIN: 1875.1,2365.81 1850.1,2365.81 1857.6,2378.95 1867.6,2378.95
  region net VIN: 1642,2370.55 1617,2370.55 1624.5,2383.65 1634.5,2383.65
  region net U2_1: 2109.9,2153.85 2084.9,2153.85 2092.4,2166.95 2102.4,2166.95
  region net U2_1: 2084.9,2112.05 2109.9,2112.05 2102.4,2098.95 2092.4,2098.95
  region net U2_1: 2035.1,2153.85 2010.1,2153.85 2017.6,2166.95 2027.6,2166.95
  region net 3V3: 2109.9,2271.95 2084.9,2271.95 2092.4,2285.05 2102.4,2285.05
  region net 3V3: 2065.1,2310.39 2090.1,2310.39 2082.6,2297.35 2072.6,2297.35
  region net 3V3: 2090.1,2353.69 2065.1,2353.69 2072.6,2368.69 2082.6,2368.69
  region net +5V: 1957.28,2173.15 1957.28,2191.3 1972.28,2190.65 1972.28,2180.65
  region net +5V: 1950.1,2191.3 1925.1,2191.3 1932.6,2204.35 1942.6,2204.35
  region net UCAP: 2465,2013.75 2440,2013.75 2447.5,2028.75 2457.5,2028.75
  region net RN1_1: 3147.1,2155.65 3147.1,2180.65 3160.2,2173.15 3160.2,2163.15
  region net RN1_2: 3147.1,2104.85 3147.1,2129.85 3160.2,2122.35 3160.2,2112.35
  region net RN1_3: 3147.1,2054.25 3147.1,2079.25 3160.2,2071.75 3160.2,2061.75
  region net RN1_4: 3147.1,2003.45 3147.1,2028.45 3160.2,2020.95 3160.2,2010.95
  region net +5V: 2965.1,2028.45 2965.1,2003.45 2952,2010.95 2952,2020.95
  region net RX1: 2965.1,2079.25 2965.1,2054.25 2950.1,2061.75 2950.1,2071.75
  region net TX1: 3019.3,2104.85 3019.3,2129.85 3032.4,2122.35 3032.4,2112.35
  region net IO13: 2965.1,2180.65 2965.1,2155.65 2952,2163.15 2952,2173.15
  region net VIN: 1773.6,2368.95 1748.6,2368.95 1756.1,2382.05 1766.1,2382.05
  region net Q1_2: 1711.2,2221.35 1736.2,2221.35 1728.7,2206.35 1718.7,2206.35
  region net +5V: 1811,2270.55 1786,2270.55 1793.5,2283.65 1803.5,2283.65
  region net D3/SCL: 2432.5,1723.55 2407.5,1723.55 2415,1738.55 2425,1738.55
  region net +5V: 2517.5,2069.25 2542.5,2069.25 2535,2056.15 2525,2056.15
  region net AVCC: 2501.5,2184.55 2501.5,2159.55 2488.4,2167.05 2488.4,2177.05
  region net AVCC: 2461.65,2164.65 2461.65,2189.65 2476.65,2182.15 2476.65,2172.15
  region net AVCC: 2452.5,2196.85 2427.5,2196.85 2435,2211.85 2445,2211.85
  region net HWB: 2692.5,2174.88 2667.5,2174.88 2675,2187.95 2685,2187.95
  region net AREF: 2227.6,2353.75 2202.6,2353.75 2210.1,2368.75 2220.1,2368.75
  region net U2_1: 2102.34,1989.55 2102.34,2014.55 2087.34,2007.05 2087.34,1997.05
  region net U2_1: 2139.87,2041.42 2116.12,2033.6 2118.3,2050.11 2128.3,2053.41
  region net U2_1: 2108.06,1989.55 2108.06,2014.55 2123.06,2007.05 2123.06,1997.05
  region net Q1_2: 2046,2047.42 2037.46,2070.92 2025.81,2059.05 2029.45,2049.05
  region net U2_1: 2102.34,1989.55 2102.34,2014.55 2087.34,2007.05 2087.34,1997.05
  region net U2_1: 2139.87,2041.42 2116.12,2033.6 2118.3,2050.11 2128.3,2053.41
  region net U2_1: 2108.06,1989.55 2108.06,2014.55 2123.06,2007.05 2123.06,1997.05
  region net Q1_2: 2046,2047.42 2037.46,2070.92 2025.81,2059.05 2029.45,2049.05

## Silkscreen, mask and mechanical layers (free items; w line width, h text height)
Top Overlay:
  text "D5" at 3080.54,2481.08 h19.68 r90
  text "A5" at 2380.54,2479.35 h19.68 r90
  text "D7" at 2184.84,2477.05 h19.68 r90
  text "A1" at 2779.84,2477.05 h19.68 r90
  text "A0" at 2879.84,2476.71 h19.68 r88
  text "IO9" at 3280.54,2474.3 h19.68 r90
  text "A4" at 2479.84,2472.22 h19.68 r91
  text "A3" at 2579.84,2472.05 h19.68 r90
  text "A2" at 2679.84,2471.88 h19.68 r89
  text "VIN" at 1679.84,2471.05 h19.68 r90
  text "GND" at 1779.9,2471.06 h19.68 r90
  text "IO13" at 2980.54,2468.03 h19.68 r90
  text "IO10" at 3180.54,2468.04 h19.68 r90
  text "GND" at 1980.53,2466.77 h19.68 r90
  text "GND" at 3379.84,2467.05 h19.68 r90
  text "+5V" at 1880.54,2462.27 h19.68 r90
  text "3V3" at 2079.84,2462.05 h19.68 r90
  text "AREF" at 2279.84,2457.05 h19.68 r90
  text "Ver 1.0" at 1870.39,1739.55 h45 r1
  text "D4" at 3079.84,1677.05 h19.68 r90
  text "D2" at 2580.53,1676.07 h19.68 r90
  text "D6" at 3280.54,1671.95 h19.68 r90
  text "RX" at 1680.6,1671.1 h19.68 r90
  text "D3" at 2480.53,1671.04 h19.68 r90
  text "IO8" at 3380.54,1668.35 h19.68 r90
  text "IO11" at 2080.61,1666.03 h19.68 r90
  text "MOSI" at 1880.61,1663.15 h19.68 r90
  text "MISO" at 1980.61,1663.19 h19.68 r90
  text "SCK" at 1780.61,1661.74 h19.68 r90
  text "GND" at 2180.54,1661.74 h19.68 r90
  text "GND" at 2380.53,1661.79 h19.68 r90
  text "GND" at 2880.53,1661.77 h19.68 r90
  text "+5V" at 2281.84,1657.05 h19.68 r90
  text "D0/RX" at 2679.83,1653.07 h19.68 r93
  text "D1/TXT" at 2782.32,1653.24 h19.68 r94
  text "RESET" at 2979.84,1652.05 h19.68 r90
  text "IO12/PD6" at 3179.13,1652.17 h19.68 r93
Document:
  lines w0.1: 2519,2055.03 2521,2057.03